# Altium PCB ESP32 V.1.0.PcbDoc (part 2 of 2)
Units mil, origin at the board's own origin, x right, y up, seen from the top; angles counter-clockwise.
Board outline 2700 x 1000 mil, 4 copper layers (L1, L2, L3, L4), stack 61.583 mil thick; 64 components, 73 nets, 299 pads, 144 vias.
Unrouted connection lines stored in the file: 52.
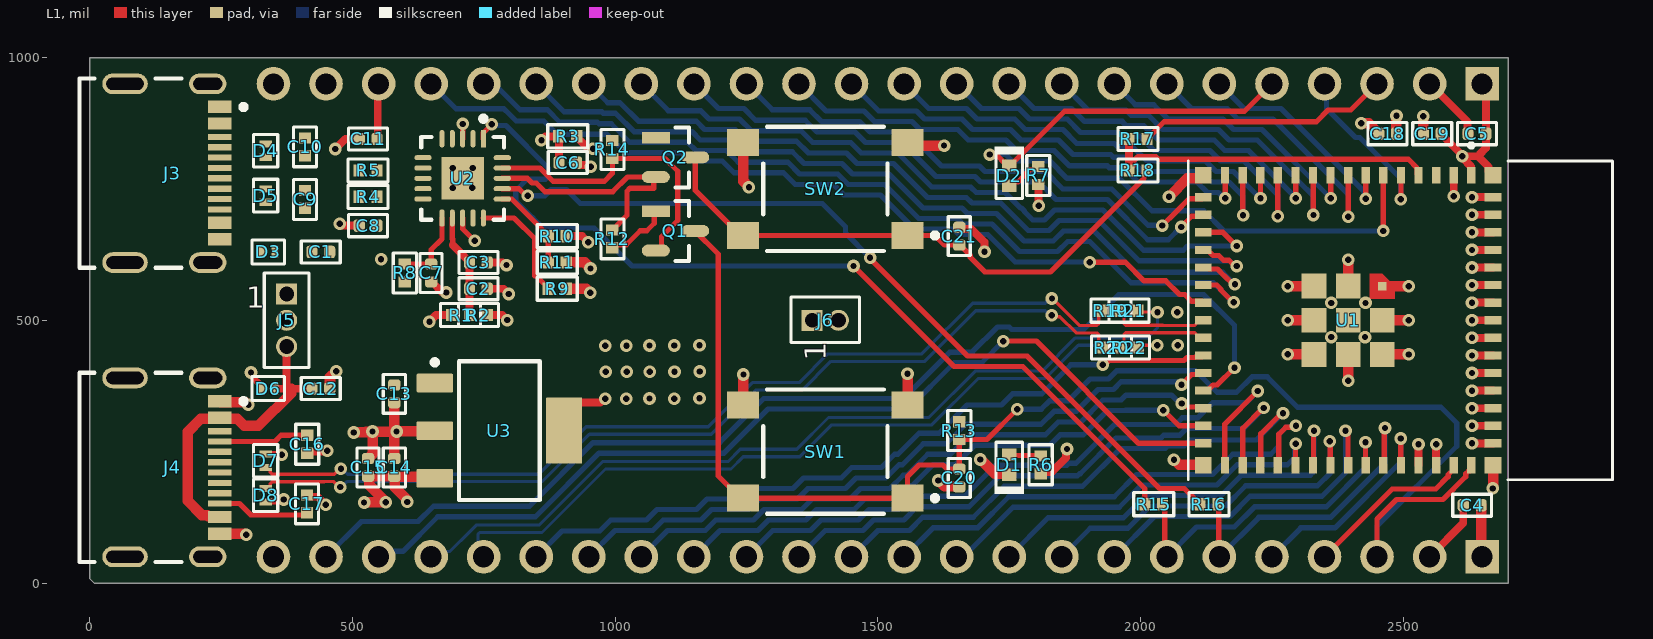
[diagram p0: L1 view]

## Part data (continued)
U1: "SMD module, ESP32-S3FN8, 8 MB SPI flash, PCB antenna", LCSC Part Number=C2913206, Manufacturer="Espressif Systems", Supplier Part Number=1965-ESP32-S3-MINI-1-N8CT-ND, Category=LDO, ComponentLink1Description=https://datasheet.octopart.com/ESP32-S3-MINI-1-N8-Espressif-Systems-datasheet-165560562.pdf?src-supplier=TME, ComponentLink1URL=https://datasheet.octopart.com/ESP32-S3-MINI-1-N8-Espressif-Systems-datasheet-165560562.pdf?src-supplier=TME, Manufacturer Part Number=ESP32-S3-MINI-1-N8, Pricing="1=3.1, 650=3.10002 (USD)", RoHS=No, Stock=7263, Supplier=Digikey
U2: "IC USB SERIAL FULL UART 20QFN", Case/Package=HVQCCN, LCSC Part Number=C132159, Manufacturer=FTDI, Max Operating Temperature=85°C, Max Supply Current=8.4mA, Max Supply Voltage=5.5V, Min Operating Temperature=-40°C, Min Supply Voltage=2.97V, Nominal Supply Voltage=5V, Package Shape=Square, Package Style="CHIP CARRIER, HEAT SINK/SLUG, VERY THIN PROFILEMeter", Power Supplies=3.3/5V, Supplier Part Number=768-1128-1-ND, Temperature Grade=INDUSTRIAL, Category="Interface ICs", ComponentLink1Description=https://datasheet.ciiva.com:443/pdfs/VipMasterIC/IC/FTDI/FTDIS00099/FTDIS00099-1.pdf?src-supplier=IHS+Markit, ComponentLink1URL=https://datasheet.ciiva.com:443/pdfs/VipMasterIC/IC/FTDI/FTDIS00099/FTDIS00099-1.pdf?src-supplier=IHS+Markit, ComponentLink2Description=https://datasheet.ciiva.com/1787/ds-ft231x-1787312.pdf?src-supplier=Digikey, ComponentLink2URL=https://datasheet.ciiva.com/1787/ds-ft231x-1787312.pdf?src-supplier=Digikey, ComponentLink3Description=https://datasheet.ciiva.com/30475/0900766b811020d3-30475405.pdf?src-supplier=Rs, ComponentLink3URL=https://datasheet.ciiva.com/30475/0900766b811020d3-30475405.pdf?src-supplier=Rs, ComponentLink4Description=https://datasheet.ciiva.com/4787/ds-ft231x-13571-4787570.pdf?src-supplier=Mouser, ComponentLink4URL=https://datasheet.ciiva.com/4787/ds-ft231x-13571-4787570.pdf?src-supplier=Mouser, ComponentLink5Description=https://datasheet.ciiva.com/1787/ft-x-series-1787313.pdf?src-supplier=Digikey, ComponentLink5URL=https://datasheet.ciiva.com/1787/ft-x-series-1787313.pdf?src-supplier=Digikey, ComponentLink6Description=https://datasheet.ciiva.com/1787/ft-x-series-1787314.pdf?src-supplier=Digikey, ComponentLink6URL=https://datasheet.ciiva.com/1787/ft-x-series-1787314.pdf?src-supplier=Digikey, Height - Seated (Max)=0.8mm, JESD-30 Code=S-XQCC-N20, Length=4mm, Manufacturer Part Number=FT231XQ-R, Pins=20, Pricing="1=2.34, 25=2.27, 100=2.2, 250=2, 500=1.82002, 1000=1.7625 (USD)", Qualification Status="Not Qualified", Reach SVHC Compliant=Yes, RoHS=Yes, RoHS Compliant=Yes, Stock=54348, Supplier=Digikey, Surface Mount=Yes, Technology=CMOS, Terminal Form="No Lead", Terminal Pitch=0.5mm, Terminal Position=QUAD, Width=4mm
U3: "IC REG LINEAR 3.3V 1.5A SOT223-4", Case/Package=SOP, Dropout Voltage1-Max=550mV, Dropout Voltage1-Nom=340mV, Input Voltage Absolute-Max=20V, LCSC Part Number=C181262, Manufacturer="Texas Instruments", Min Input Voltage=3.8V, Operating Temperature, TJ-Max=125°C, Operating Temperature, TJ-Min=-40°C, Output Current1-Max=1.5A, Output Voltage1-Max=3.4V, Output Voltage1-Min=3.2V, Output Voltage1-Nom=3.3V, Package Body Material=Plastic, Package Shape=Rectangular, Peak Reflow Temperature (Cel)=260°C, Supplier Part Number=296-24897-1-ND, Voltage Tolerance-Max=3%, Adjustability=FIXED, Category="Voltage Regulators - Linear", Channels=1, ComponentLink1Description=https://www.ti.com:443/lit/ds/symlink/tl1963a.pdf?src-supplier=IHS+Markit, ComponentLink1URL=https://www.ti.com:443/lit/ds/symlink/tl1963a.pdf?src-supplier=IHS+Markit, ComponentLink2Description=https://datasheet.ciiva.com/2046/-2046068.pdf?src-supplier=Digikey, ComponentLink2URL=https://datasheet.ciiva.com/2046/-2046068.pdf?src-supplier=Digikey, Height - Seated (Max)=1.8mm, JESD-30 Code=R-PDSO-G4, JESD-609 Code=e3, Length=6.5mm, Manufacturer Part Number=TL1963A-33DCYR, Max Supply Voltage=20V, Moisture Sensitivity Level=2, Number of Outputs=1, Packaging="Tape and Reel", Pins=4, Pricing="1=2.78, 10=2.075, 25=1.8984, 100=1.7043, 250=1.61188, 500=1.55614, 1000=1.51027 (USD)", Qualification Status="Not Qualified", Reach SVHC Compliant=Yes, Regulator Type="FIXED POSITIVE SINGLE OUTPUT LDO REGULATOR", RoHS=Yes, RoHS Compliant=Yes, Stock=4696, Supplier=Digikey, Surface Mount=Yes, Technology=BIPOLAR, Terminal Finish=Tin, Terminal Form="Gull Wing", Terminal Pitch=2.3mm, Terminal Position=DUAL, Width=3.5mm

## Via types
v1: diameter 24, hole 12, L1 to L4, 144 vias

## Nets (pads, with @x,y where several pads share a name; then routed paths per layer and width w, separated by ;. In a path a pad name is that pad's centre, name@x,y a point inside that pad or via, vN(x,y) a via of type N, cw(c..) or ccw(c..) an arc to the next point about the centre after c; other vN are vias at no path point)
+3V3: C4.2 C5.2 C18.2 C19.2 J1.2 J2.1 J6.2 R2.1 R3.1 R6.2 R7.2 R13.2 U1.3 | length 495.3
  L1 w15: R2.1 785.39,510 v1(795.06,500.34) ; R3.1 927.01,848.82 949.18,826.65 v1(957.96,826.65) ; R7.2 1805.67,758.16 1805.67,718.17 v1(1806.08,717.75) ; R6.2 1813.13,211.12 1831.12,211.12 1858.28,238.28 1858.28,253.28 v1(1860,255) ; J1.2 2622.44,877.56 C5.2@2622.44,855.63
  L1 w20: C18.2 v1(2486.93,888.93) v1@2487,889 ; C19.2 v1(2538.07,888.07) v1@2539,889 ; C5.2@2622.44,855.63 C5.2 ; C4.2 2647.93,52.07 J2.1
+3V3_FTDI: C6.2 C8.2 R3.2 R8.1 U2.10 U2.20 | length 80.3
  L1 w15: R8.1@596.87,576.12 R8.1 ; v1@867.12,850 R3.2 R3.2 893.03,800.04 C6.2
  other v1: 554.79,615.87 859.89,842.77
+3V3_REG: C14.2 C15.2 J6.1 U3.3 | length 292.9
  L1 w20: v1(522.41,153.26) 563.02,153.26 v1(563.55,153.8) 563.55,154.88 548.71,169.72 548.71,170.07 531.81,186.97 531.81,202.44 531.18,203.07 C15.2 C14.2 ; v1(604.7,154.34) 603.93,155.1 603.93,159.6 581.1,182.44 581.1,202.44 580.47,203.07 C14.2 ; U3.3 653.98,202.44 580.63,202.44 C14.2
+5V: C11.2 C13.2 J1.22 J5.2 R1.1 U3.1 | length 153.7
  L1 w10: C11.2 C11.2@548.46,846.54 ; J1.22@548.46,948.46 J1.22
  L1 w15: C11.2@548.46,846.54 J1.22@548.46,948.46 ; v1(646.73,497.45) 659.28,510 R1.1
+5V_VBUS1: C1.2 D3.2 J3.A4B9 J3.B4A9 J5.1 R10.2 | length 46.7
  L1 w15: R10.2 937.66,660 v1(949.01,648.65)
+5V_VBUS2: C12.2 D6.2 J4.A4B9 J4.B4A9 J5.3 | length 603.2
  L1 w14: D6.2 375,370 ; 383.58,370 C12.2
  L1 w15: 375,370 383.58,361.42 ; 375,374.35 J5.3
  L1 w20: J4.B4A9 245.83,127.4 225.52,127.4 223.65,129.28 213.95,129.28 186.49,156.73 186.49,287.42 211.83,312.76 245.83,312.76 J4.A4B9 249.45,312.76 281.21,312.76 294.72,299.24 295.73,299.24 321.4,299.24 383.58,361.42 383.58,370
+VCC_FTDI: C2.2 C3.2 R1.2 R2.2 U2.12 | length 198.2
  L1 w10: U2.12 690.32,655.17 691.03,654.45
  L1 w10.01: 691.03,643.22 691.03,654.45
  L1 w15: 691.03,643.22 723.07,611.18 C3.2 C2.2 723.03,559.96 R2.2 R2.2
BTN_GPIO0: C21.2 Q2.3 R18.1 SW2.1 SW2.2 | length 1074.6
  L1 w10.01: Q2.3 1152.42,747.58 1238.58,661.42 SW2.2 SW2.1 1608.57,661.42 1626.91,643.07 C21.2 1656.18,643.07 1676.02,623.23 1676.02,619.33 1703.7,591.65 1828.3,591.65 2006.38,769.73 2006.38,779.38 R18.1
CHIP_PU: C20.2 J2.3 Q1.3 R13.1 SW1.1 SW1.2 U1.45 | length 2755.2
  L1 w10: Q1.3 1196.41,626.01 1196.41,203.59 1238.58,161.42 SW1.2 SW1.1 1556.5,202.37 1578.55,224.42 1623.76,224.42 1631.25,216.93 C20.2 R13.1 1707.58,272.99 v1(1765.28,330.7) ; J2.3 2450,121.72 2487.28,159 2575.25,159 2618.7,202.45 2618.7,207.8 2624.56,213.66 2626.42,213.66 2629.29,216.54 U1.45
  L4 w10: v1(1765.28,330.7) 1810.83,330.7 1826.78,346.64 1862.18,346.64 1903.96,388.43 1939.14,388.43 1954.89,404.17 2103.99,404.17 2145.27,362.89 2182.43,362.89 2211.87,392.33 2241.06,392.33 2298.87,334.52 2571.59,334.52 2601.63,304.48 2601.63,260.36 2450,108.73 J2.3
CON1_USB_N: D4.2 J3.A7 J3.B7 R4.1
CON1_USB_P: D5.2 J3.A6 J3.B6 R5.1
CON2_USB_N: D7.2 J4.A7 J4.B7 R19.1 | length 1790.8
  L1 w6.23: D7.2 339.92,220 343.7,216.23 343.7,210.76 347.35,207.11 440.85,207.11 440.97,207.23 465.78,207.23 476.2,217.65 v1(478.31,217.65) ; v1(1831.31,541.52) 1831.66,541.52 1883.09,490.09 1916.51,490.09 1920.16,493.74 1920.16,511.64 R19.1
  L4 w6.23: v1(478.31,217.65) 480.43,217.65 490.85,207.23 855.05,207.23 945.26,297.44 1177.52,297.44 1261.48,381.41 1350.41,381.41 1404.85,435.85 1583.64,435.85 1680.33,532.53 1818.78,532.53 1827.77,541.52 v1(1831.31,541.52)
CON2_USB_P: D8.2 J4.A6 J4.B6 R20.1 | length 1783.4
  L1 w6.23: D8.2 339.92,180 343.7,183.77 343.7,189.24 347.35,192.89 446.75,192.89 446.86,193 464.79,193 475.21,182.58 v1(477.32,182.58) ; v1(1831.17,509.31) 1833.76,506.73 1846.32,506.73 1877.2,475.86 1916.51,475.86 1920.16,472.21 1920.16,455.69 R20.1
  L4 w6.23: v1(477.32,182.58) 479.43,182.58 489.86,193 860.95,193 951.15,283.21 1183.41,283.21 1267.38,367.17 1356.3,367.17 1410.75,421.62 1589.54,421.62 1686.22,518.3 1818.64,518.3 1827.63,509.31 v1(1831.17,509.31)
CON_ESP_USB_N: J2.21 R21.1 | length 1631.1
  L1 w6.03: R21.1 1997.46,515.44 v1(2032.19,515.44)
  L4 w6.03: J2.21 660.17,60.17 685.82,60.17 724.09,98.44 735.84,110.19 855.17,110.19 976.06,231.08 1214.81,231.08 1238.18,254.45 1345.61,254.45 1406.21,315.05 1596.96,315.05 1685.17,403.26 1812.62,403.26 1875.91,466.55 2013.25,466.55 2032.19,485.48 v1(2032.19,515.44)
CON_ESP_USB_P: J2.20 R22.1 | length 1540
  L1 w6.03: R22.1 2000.05,452.52 v1(2031.77,452.52)
  L4 w6.03: J2.20 734.31,50 738.91,54.59 738.91,92.63 742.44,96.16 860.98,96.16 981.87,217.05 1220.62,217.05 1243.99,240.42 1351.43,240.42 1412.02,301.01 1602.77,301.01 1690.98,389.23 1818.43,389.23 1881.72,452.52 v1(2031.77,452.52)
CON_GPIO0: J1.3 R17.1 | length 482.2
  L1 w10.01: R17.1 2012.01,846.18 2017.63,851.81 2018.81,851.81 2044.86,877.85 2334.67,877.85 2356.82,900 2400,900 J1.3
DTR_FTDI: Q2.2 R12.2 U2.18 | length 471.7
  L1 w10: U2.18 833.43,770 842.1,761.33 843.38,761.33 849.97,761.33 866.65,744.65 995.43,744.65 1023.59,772.81 Q2.2@1073.75,772.81 ; R12.2 1022.85,699.86 1022.85,745.55 1028.71,751.41 1073.75,751.41 1073.75,768.77 Q2.2
ESP_USB_N: R19.2 R21.2 U1.23 | length 184.8
  L1 w6.03: R19.2 1968.32,510.56 1968.32,493.93 1971.86,490.39 2042.63,490.39 2042.74,490.28 2103.18,490.28 2106.72,493.82 2106.72,495.14 2111.57,500 U1.23
ESP_USB_P: R20.2 R22.2 U1.24 | length 184.8
  L1 w6.03: R20.2 1968.32,454.81 1968.32,472.83 1971.86,476.36 2036.82,476.36 2036.93,476.25 2103.18,476.25 2106.72,472.72 2106.72,471.39 2111.57,466.54 U1.24
FTDI_RESET: C7.2 R8.2 U2.11 | length 146.2
  L1 w10: R8.2 R8.2 649.96,606.97 C7.2 650,634.26 670.63,654.89 U2.11
FTDI_USB_N: R4.2 U2.9
FTDI_USB_P: R5.2 U2.8
GND: C1.1 C2.1 C3.1 C4.1 C5.1 C6.1 C7.1 C8.1 C9.1 C10.1 C11.1 C12.1 C13.1 C14.1 C15.1 C16.1 C17.1 C18.1 C19.1 C20.1 C21.1 D1.1 D3.1 D4.1 D5.1 D6.1 D7.1 D8.1 J1.1 J1.23 J2.2 J2.24 J3.A1B12 J3.B1A12 J3.S1 J3.S2 J3.S3 J3.S4 J4.A1B12 J4.B1A12 J4.S1 J4.S2 J4.S3 J4.S4 R9.2 R11.1 SW1.3 SW1.4 SW2.3 SW2.4 U1.1 U1.2 U1.42 U1.43 U1.46 U1.47 U1.48 U1.49 U1.50 U1.51 U1.52 U1.53 U1.54 U1.55 U1.56 U1.57 U1.58 U1.59 U1.60 U1.61 U1.62 U1.63 U1.64 U1.65 U1.66 U1.67 U1.68 U1.69 U1.70 U1.71 U1.72 U1.73 U2.3 U2.13 U2.21 U3.2 U3.4 | length 3475.4
  L1 w10: U2.13 710.23,694.36 710.23,673.78 v1(732.93,651.08)
  L1 w10.01: U2.3 v1(710,873.58)
  L1 w12: v1(307.34,400.53) 307.34,394.79 327.2,374.92 D6.1 ; D8.1 335.89,155.3 362.63,155.3 366.19,158.85 v1(369.43,158.85) ; D7.1 364.15,245.59 v1@367.17,242.57
  L1 w14: C17.1 417.36,164.14 434.09,164.14 v1(449.38,148.85) ; C16.1 416.85,249.66 450.47,249.66 v1(452.38,251.57)
  L1 w15: v1(467.66,825.96) 486.71,845 C11.1 ; v1(476.05,683.46) 479.5,680 C8.1 ; C7.1 651.18,573.07 671.42,552.83 v1(678.99,552.83) ; C2.1 787.89,560 v1(797.95,549.94) ; C3.1 786.02,610 791.01,605.01 v1(793.44,605.01) ; U3.4 903.03,316.48 929.98,343.43 971.8,343.43 979.13,350.75 v1(981.56,350.75) ; C6.1 926.93,798.82 930.06,795.69 947.65,795.69 951.09,792.25 v1(953.53,792.25) ; C21.1 1658.13,673.8 1677.86,673.8 1703.02,648.64 v1(1703.02,630.52) ; U1.42 v1(2528.9,264.29) ; J2.2 2614.07,114.07 C4.1 ; U1.43 v1(2562.36,264.29) ; C19.1 2571.93,853.82 2612,813.75 v1(2612,812) ; v1(2595.83,735.71) U1.2 ; U1.1 2628.92,775.96 2628.92,792.65 2612,809.56 v1(2612,812) ; v1@2630,735 v1(2630.75,734.25) U1.60 ; v1(2630.75,265.75) U1.46 ; v1(2630.75,299.21) U1.47 ; v1(2630.75,332.68) U1.48 ; v1(2630.75,366.14) U1.49 ; v1(2630.75,399.61) U1.50 ; v1(2630.75,433.07) U1.51 ; v1(2630.75,466.54) U1.52 ; v1(2630.75,500) U1.53 ; v1(2630.75,533.46) U1.54 ; v1(2630.75,566.93) U1.55 ; v1(2630.75,600.39) U1.56 ; v1(2630.75,633.86) U1.57 ; v1(2630.75,667.32) U1.58 ; v1(2630.75,700.79) U1.59 ; J1.1 2656.93,943.07 C5.1 2656.93,827.77 2644.72,815.56 2644.72,814.72 2642,812 ; U1.62 2662.38,783.84 2662.38,791.62 2642,812 ; v1(2612,812) 2642,812
  L1 w20: J4.B1A12 295.1,94.09 297.08,92.11 v1(298.16,92.11) ; J4.A1B12 249.45,344.25 296.13,344.25 301.29,339.1 v1(302.37,339.1) ; C12.1 457.56,370.63 457.56,391.31 v1(469.26,403.02) ; v1(502.92,286.54) 503.68,287.3 525.79,287.3 526.1,287.6 537.89,287.6 v1(538.52,288.23) ; C15.1 531.18,236.93 531.81,237.56 531.81,238.74 538.52,245.45 v1(538.52,288.23) ; C14.1 580,282.89 584.26,287.15 v1(584.26,288.23) ; C13.1 580,293.57 584.26,289.31 v1(584.26,288.23) ; U3.2 655.97,289 585.03,289 v1(584.26,288.23) ; R9.2 945.04,560 v1(952.97,552.07) ; R11.1 941.89,610 v1(953.33,598.56) ; SW1.4 1243.5,396.11 v1(1244.22,396.83) ; SW2.4 1243.88,838.2 1243.88,764.97 1254.75,754.11 v1(1254.75,753.02) ; SW1.3 v1(1556.5,398.5) ; SW2.3 1562.66,832.42 v1(1626.09,832.42) ; v1(1615,195) 1616.08,195 1627.38,183.7 1654.37,183.7 C20.1 ; v1(1695,235) 1696.08,235 1722.97,208.11 1748.19,208.11 D1.1 ; v1(2054.17,735.31) 2088.7,769.84 2113.7,769.84 U1.63 ; v1(2063.46,234.43) 2064.54,234.43 2073.7,225.27 2118.59,225.27 U1.64 ; v1(2280,435.08) U1.73@2330.04,435.08 ; v1(2280,500.04) U1.72@2330.04,500.04 ; v1(2280,565) 2330.04,565 U1.71 ; v1(2395,384.96) U1.70 ; U1.69@2395.08,565 v1(2395.08,615.04) ; v1(2420,875) 2434.25,875 2453.07,856.18 C18.1 ; U1.68 v1(2510.08,435) ; U1.67 v1(2510.08,499.96) ; U1.66@2460.04,564.92 v1(2510.08,564.92) ; v1(2670,180) 2670.63,180.63 U1.65 ; v1(538.52,288.23) v1(584.26,288.23)
  other v1: 365.66,244.08 1021.58,350.61 1065.43,351.12 1112.58,350.93 1160.73,351.35 982.1,401.91 1022.11,401.77 1065.96,402.28 1113.11,402.08 1161.27,402.51 981.61,451.71 1021.62,451.57 1065.47,452.08 1112.62,451.88 1160.77,452.31 2070.48,452.51 2363,468 2427,468 2069.89,515.04 2363,533 2428,533 691.19,751.8 728.29,752.15 691.37,789.67 729.48,789.67
GPIO0: R17.2 R18.2 U1.4 | length 649.3
  L1 w10: R18.2 1977.99,786.18 1986.38,794.57 1986.38,803.02 1995.16,811.81 2028.85,811.81 2034.32,806.34 2509.52,806.34 2526.02,789.84 2526.02,778.46 U1.4
  L1 w15: R18.2 R17.2
GPIO1: J1.4 U1.5 | length 320.6
  L1 w10: v1@2495,740 2495.43,740.43 U1.5
  L4 w10: J1.4 2353.82,946.18 2353.82,903 2408.82,848 2417,848 2495,770 v1(2495,730)
GPIO2: D2.1 J1.5 U1.6 | length 1525.4
  L1 w10: v1(1713.25,815.26) 1715.93,812.59 1728.16,812.59 1740.24,800.51 1743.19,800.51 D2.1 1751.97,793.7 1758.78,800.51 1758.78,801.5 1855.14,897.86 2197.86,897.86 J1.5 ; v1@2461.97,670.04 U1.6
  L4 w10: v1(1713.25,815.26) 1743.31,815.26 1755.58,803 1827.29,803 1860.29,770 1960.15,770 2021.84,708.31 2120.23,708.31 2158.54,670 v1(2461.93,670)
GPIO3: J1.6 U1.7 | length 419.6
  L1 w10: U1.7@2428.07,775.16 U1.7 v1(2428.5,731.5)
  L4 w10: J1.6 2197,903 2267,903 2425.83,744.17 2425.83,734.17 v1(2428.5,731.5)
GPIO4: J1.7 U1.8 | length 553.7
  L1 w10: U1.8 2395.39,775.24 v1(2395.39,697.22)
  L4 w10: J1.7 2097,903 2165,903 2185,883 2252,883 2395.73,739.27 2395.73,697.57 v1(2395.39,697.22)
GPIO5: J1.8 U1.9 | length 546.1
  L1 w10: v1(2362.01,731.93) U1.9@2362.01,776.02
  L4 w10: J1.8 1990,910 2025,910 2052,883 2156.72,883 2176.72,863 2230.94,863 v1@2361.78,732.15
GPIO6: J1.9 U1.10 | length 679.1
  L1 w10: U1.10 2328.49,775.22 2328.49,700.61 v1(2328.86,700.24)
  L4 w10: J1.9 1899.86,900.14 1971.58,900.14 1981.72,890 2015,890 2042,863 2148.43,863 2168.43,843 2222,843 2306.07,758.93 2306.26,758.93 2322.08,743.11 2322.08,742.92 2328.5,736.5 2328.5,700.6 v1(2328.86,700.24)
GPIO7: J1.10 U1.11 | length 680.4
  L1 w10: v1(2295.08,731.93) U1.11@2295.08,776.02
  L4 w10: J1.10 1797,903 1868.72,903 1893.19,878.52 1964.91,878.52 1973.43,870 2006.72,870 2033.72,843 2140.15,843 2160.15,823 2205.59,823 2295.08,733.51 v1(2295.08,731.93)
GPIO8: J1.11 U1.12 | length 818
  L1 w10: v1(2260.87,698) 2261.03,698.15 2261.03,775.44 U1.12@2261.4,775.81
  L4 w10: J1.11 1697,903 1768.72,903 1788.72,883 1860.43,883 1885.93,857.5 1957.64,857.5 1965.15,850 1998.43,850 2025.43,823 2131.86,823 2151.86,803 2197,803 2261.62,738.38 2261.62,698.74 v1(2260.87,698)
GPIO9: J1.12 U1.13 | length 812.6
  L1 w10: v1(2228.15,731.93) U1.13@2228.15,776.02
  L4 w10: J1.12 1597,903 1668.72,903 1688.72,883 1760.43,883 1780.43,863 1852.15,863 1878.66,836.49 1950.38,836.49 1956.86,830 1985,830 2012,803 2123.58,803 2143.58,783 2176.62,783 2227.69,731.93 v1(2228.15,731.93)
GPIO10: J1.13 U1.14 | length 945.6
  L1 w10: U1.14@2194.32,775.65 2194.63,775.34 2194.63,700.49 v1(2195,700.11)
  L4 w10: J1.13 1501.64,898.36 1573.36,898.36 1588.72,883 1660.43,883 1680.43,863 1752.15,863 1772.15,843 1843.86,843 1871.39,815.47 1943.11,815.47 1948.58,810 1976.72,810 2003.72,783 2115.29,783 2135.29,763 2168.33,763 2195,736.33 v1(2195,700.11)
GPIO11: J1.14 U1.15 | length 945.6
  L1 w10: v1(2161.22,731.93) U1.15@2161.22,776.02
  L4 w10: J1.14 1401.64,898.36 1473.36,898.36 1493.36,878.36 1565.07,878.36 1580.43,863 1652.15,863 1672.15,843 1743.86,843 1763.86,823 1835.58,823 1864.73,793.85 1936.44,793.85 1940.29,790 1968.43,790 1995.43,763 2107.01,763 2127.01,743 2148.36,743 2159.43,731.93 v1(2161.22,731.93)
GPIO12: J1.15 U1.16 | length 1003.6
  L1 w10: v1(2041.35,680.17) 2066.23,705.05 2092.56,731.38 2116.57,731.38 U1.16
  L4 w10: J1.15 1299.3,900.7 1370.3,900.7 1392.64,878.36 1465.07,878.36 1485.07,858.36 1556.79,858.36 1621.48,793.67 1693.2,793.67 1703.86,783 1819.01,783 1852.01,750 1945.16,750 2014.35,680.81 2040.72,680.81 v1(2041.35,680.17)
GPIO13: J1.16 U1.17 | length 1112.1
  L1 w10: v1(2077.14,677.56) 2097.49,697.91 2108.7,697.91 2111.57,700.79 U1.17
  L4 w10: J1.16 1197,903 1245.26,903 1267.57,880.7 1362.02,880.7 1384.36,858.36 1456.79,858.36 1476.79,838.36 1546.22,838.36 1610.91,773.67 1684.91,773.67 1695.58,763 1806.3,763 1839.3,730 1936.88,730 2013.71,653.17 2052.75,653.17 v1(2077.14,677.56)
GPIO14: J1.17 U1.18 | length 1358.3
  L1 w10: U1.18 2156.86,667.32 v1(2182.83,641.34)
  L4 w10: J1.17 1101.13,898.87 1162.82,898.87 1178.68,883 1236.98,883 1259.28,860.7 1353.73,860.7 1376.07,838.36 1448.51,838.36 1468.51,818.36 1537.93,818.36 1602.62,753.67 1676.63,753.67 1687.29,743 1742.29,743 1771.62,713.67 1773.22,713.67 1779.08,707.81 1779.08,706.57 1794.9,690.75 1817.27,690.75 1836.51,710 1928.6,710 2005.42,633.17 2081.3,633.17 2089.47,641.34 v1(2182.83,641.34)
GPIO15: J1.18 U1.19 | length 1468.6
  L1 w10: U1.19 2127.32,633.86 2137.91,623.27 2148.75,623.27 2157.81,614.21 2167.98,614.21 2179.05,603.14 v1(2182.83,603.14)
  L4 w10: J1.18 986.03,913.97 1009.28,913.97 1044.38,878.87 1154.53,878.87 1170.4,863 1228.7,863 1251,840.7 1345.45,840.7 1367.79,818.36 1440.22,818.36 1460.22,798.36 1529.65,798.36 1594.34,733.67 1668.34,733.67 1679.01,723 1734,723 1786.25,670.75 1825.55,670.75 1844.8,690 1920.31,690 1997.14,613.17 2169.01,613.17 2179.05,603.14 v1(2182.83,603.14)
GPIO16: J1.19 U1.20 | length 1576.8
  L1 w10: U1.20 2127.32,600.39 2130.2,597.52 2146.21,597.52 2158.34,585.39 2158.95,585.39 2175.77,568.57 v1(2179.56,568.57)
  L4 w10: J1.19 903.15,896.85 974.86,896.85 977.74,893.97 1000.99,893.97 1036.1,858.87 1146.25,858.87 1162.12,843 1220.41,843 1242.72,820.7 1337.17,820.7 1359.51,798.36 1431.94,798.36 1451.94,778.36 1521.36,778.36 1586.05,713.67 1660.06,713.67 1670.73,703 1725.72,703 1777.97,650.75 1833.83,650.75 1853.08,670 1911.53,670 1990.15,591.38 2156.41,591.38 2179.22,568.57 v1(2179.56,568.57)
GPIO17: J1.20 U1.21 | length 1688
  L1 w10: U1.21 2144.81,566.93 2152.56,559.18 2152.56,557.39 2175.58,534.36 v1(2177.38,534.36)
  L4 w10: J1.20 760.33,939.67 779.77,939.67 818.96,900.48 871.23,900.48 894.86,876.85 966.58,876.85 969.46,873.97 992.71,873.97 1027.81,838.87 1137.96,838.87 1153.83,823 1212.13,823 1234.43,800.7 1328.88,800.7 1351.22,778.36 1423.65,778.36 1443.65,758.36 1513.08,758.36 1577.77,693.67 1651.77,693.67 1662.44,683 1717.44,683 1769.68,630.75 1842.12,630.75 1861.36,650 1903.24,650 1981.86,571.38 2138.56,571.38 2175.58,534.36 v1(2177.38,534.36)
GPIO18: J1.21 U1.22 | length 1642
  L1 w10: v1(1903.06,610.62) 1970.91,610.62 2006.5,575.03 2047.94,575.03 2073.89,549.08 2084.09,549.08 2097.16,536.01 2116.9,536.01 U1.22
  L4 w10: J1.21 697.71,902.29 788.86,902.29 798.63,892.52 812.06,879.09 843.38,879.09 864.35,879.09 889.46,853.97 984.42,853.97 1019.53,818.87 1129.68,818.87 1145.55,803 1203.84,803 1226.15,780.7 1320.6,780.7 1342.94,758.36 1415.37,758.36 1435.37,738.36 1504.8,738.36 1569.49,673.67 1643.49,673.67 1654.16,663 1709.15,663 1761.4,610.75 1902.93,610.75 v1(1903.06,610.62)
GPIO21: J2.19 U1.25 | length 1428.1
  L1 w10: v1(1927.95,415.43) 1931.74,415.43 1939.68,423.36 2082.56,423.36 2088.42,429.22 2102.84,429.22 2103.82,430.2 2116.57,430.2 U1.25
  L4 w10: J2.19 899.14,99.14 970.86,99.14 991.72,120 1060,120 1080,140 1155.15,140 1175.15,160 1246.86,160 1266.86,180 1338.58,180 1358.58,200 1430.29,200 1450.29,220 1506.86,220 1531.91,245.05 1538.43,245.05 1578.38,285 1616,285 1669.67,338.67 1735.07,338.67 1756.41,360.01 1811.86,360.01 1867.28,415.43 v1(1927.95,415.43)
GPIO26: J2.18 U1.26 | length 1319
  L1 w10: v1(2077.76,377.17) 2097.32,396.73 2116.57,396.73 U1.26
  L4 w10: J2.18 1000,100 1071.72,100 1091.72,120 1163.43,120 1183.43,140 1255.15,140 1275.15,160 1346.86,160 1366.86,180 1438.58,180 1458.58,200 1515.15,200 1540.2,225.05 1546.72,225.05 1586.67,265 1630.25,265 1667.25,302 1810.43,302 1835.07,326.64 1877.35,326.64 1919.14,368.43 1948.14,368.43 1962.6,382.89 2068.26,382.89 2073.98,377.17 v1(2077.76,377.17)
GPIO33: J2.17 U1.28 | length 1207.1
  L1 w10: v1(2078.35,341.65) 2082.14,341.65 2088.7,335.09 2117.04,335.09 U1.28
  L4 w10: J2.17 1100,100 1171.72,100 1191.72,120 1263.43,120 1283.43,140 1355.15,140 1375.15,160 1446.86,160 1466.86,180 1523.43,180 1548.48,205.05 1555,205.05 1594.95,245 1638.53,245 1675.53,282 1818.72,282 1843.36,306.64 1886.35,306.64 1928.14,348.43 1963.01,348.43 1972.12,357.54 2058.67,357.54 2074.56,341.65 v1(2078.35,341.65)
GPIO34: J2.16 U1.29 | length 1097.3
  L1 w10: v1(2043.23,328.99) 2073.01,299.21 U1.29
  L4 w10: J2.16 1200,100 1271.72,100 1291.72,120 1363.43,120 1383.43,140 1455.15,140 1475.15,160 1531.72,160 1556.77,185.05 1565,185.05 1604.95,225 1646.82,225 1683.82,262 1827,262 1847,282 1890.91,282 1937.34,328.43 1971.29,328.43 1971.86,328.99 v1(2043.23,328.99)
GPIO35: J2.15 U1.31 | length 1270.9
  L1 w10: U1.31@2160.39,224.02 2160.39,302.67 v1(2223.05,365.33)
  L4 w10: J2.15 1300,100 1371.72,100 1391.72,120 1463.43,120 1483.43,140 1540,140 1565.05,165.05 1665.1,165.05 1724.19,224.14 1860.01,224.14 1863.87,228 1876.91,228 1950.34,301.43 2066.43,301.43 2079.27,314.27 2108.22,314.27 2136.84,342.89 2200.61,342.89 v1(2223.05,365.33)
GPIO36: J2.14 U1.32 | length 1128.9
  L1 w10: U1.32@2193.82,223.98 2194.63,224.78 2194.63,294.63 2233.16,333.16 v1(2234.65,333.16)
  L4 w10: J2.14 1400,100 1471.72,100 1491.72,120 1550,120 1575.05,145.05 1673.38,145.05 1732.47,204.14 1880.12,204.14 1883.98,208 1885.19,208 1953.26,276.07 2038.63,276.07 2043.99,281.43 2074.72,281.43 2087.56,294.27 2195.76,294.27 v1(2234.65,333.16)
GPIO37: J2.13 U1.33 | length 1052.9
  L1 w10: U1.33@2227.28,223.98 2228.86,225.55 2228.86,283.86 2268.06,323.06 v1(2270.94,323.06)
  L4 w10: J2.13 1500,100 1560,100 1585.05,125.05 1681.67,125.05 1740.76,184.14 1889.62,184.14 1961.55,256.07 2046.91,256.07 2052.27,261.43 2074.64,261.43 2074.68,261.39 2082.96,261.39 2093.76,272.19 2220.06,272.19 v1(2270.94,323.06)
GPIO38: J2.12 U1.34 | length 961.4
  L1 w10: U1.34@2260.75,223.98 2263.09,226.32 2263.09,283.09 2276.44,296.44 2292.95,296.44 v1(2295.62,299.12)
  L4 w10: J2.12 1605.05,105.05 1689.95,105.05 1749.04,164.14 1950,164.14 1992.5,206.64 2136.94,206.64 2175.29,245 2247.67,245 2262.32,259.65 2262.32,282.32 2276.44,296.44 2292.95,296.44 v1(2295.62,299.12)
GPIO39: J2.11 U1.35 | length 788.7
  L1 w10: U1.35@2294.82,224.94 2294.82,264.82 v1(2295,265)
  L4 w10: J2.11 1663.18,50 1757.33,144.14 1959.29,144.14 2001.79,186.64 2145.22,186.64 2183.58,225 2279.75,225 2292.75,238 2292.75,262.75 v1(2295,265)
GPIO40: J2.10 U1.36 | length 791.9
  L1 w10: U1.36@2327.68,223.98 2329.06,225.35 2329.06,289.06 v1(2330,290)
  L4 w10: J2.10 1824.14,124.14 1967.57,124.14 2010.07,166.64 2153.51,166.64 2191.86,205 2322.72,205 2330,212.28 v1(2330,290)
GPIO41: J2.9 U1.37 | length 684.8
  L1 w10: v1(2360,270) 2360.79,269.21 2360.79,224.33 U1.37@2361.14,223.98
  L4 w10: J2.9 1904.14,104.14 1975.86,104.14 2018.36,146.64 2161.79,146.64 2200.15,185 2336.86,185 2361.14,209.28 2361.14,268.86 v1(2360,270)
GPIO42: J2.8 U1.38 | length 654.3
  L1 w10: v1(2390,290) 2390,286.21 2394.61,281.61 U1.38@2394.61,223.98
  L4 w10: J2.8 2026.64,126.64 2170.07,126.64 2208.43,165 2345.15,165 2390,209.85 v1(2390,290)
GPIO45: J2.5 U1.41 | length 414.6
  L1 w10: v1(2495,275) 2495.22,274.78 U1.41@2495.22,225.06
  L4 w10: J2.5 2305,105 2370,105 2495,230 v1(2495,275)
GPIO46: J2.4 U1.44 | length 324.7
  L1 w10: J2.4 2479,179 2561.79,179 2585.24,202.45 2585.24,205.94 2595.83,216.54 U1.44
GPIO47: J2.23 U1.27 | length 2121.9
  L1 w10: U1.27 2127.32,366.14 2137.91,376.73 2145.69,376.73 v1(2178.64,409.68)
  L4 w10: J2.23 517.22,117.22 625.3,117.22 654.28,146.21 836.94,146.21 957.83,267.09 1198.99,267.09 1282.96,351.06 1548.84,351.06 1637.05,439.27 1679.54,439.27 1727.61,487.34 1749.98,487.34 1754.92,482.4 1782.3,482.4 1782.46,482.56 1891.92,482.56 1958.6,549.24 2119.98,549.24 2178.64,490.58 v1(2178.64,409.68)
GPIO48: J2.22 U1.30 | length 1820
  L1 w10: v1(1738.79,460.34) 1801.65,460.34 1996.24,265.75 U1.30
  L4 w10: J2.22 560.33,60.33 596.69,60.33 662.57,126.21 848.54,126.21 969.42,247.09 1207.28,247.09 1291.24,331.06 1557.12,331.06 1645.34,419.27 1697.73,419.27 v1(1738.79,460.34)
NetC9_2: C9.2 J3.A5
NetC10_2: C10.2 J3.B5
NetC16_2: C16.2 J4.A5 | length 171.6
  L1 w10: J4.A5 352.69,269.29 364.52,281.12 C16.2
NetC17_2: C17.2 J4.B5 | length 176.8
  L1 w10: J4.B5 285.28,151.18 306.9,129.56 409.53,129.56 C17.2
NetD1_2: D1.2 R6.1 | length 60.7
  L1 w10: D1.2 1750.85,242.85 1809.15,242.85 R6.1
NetD2_2: D2.2 R7.1 | length 70.6
  L1 w10: D2.2 1756.81,763.11 1766.69,763.11 1778.44,774.87 1778.44,775.41 1789.99,786.96 1799.62,786.96 R7.1
NetQ1_1: Q1.1 R12.1 | length 122.9
  L1 w10.01: R12.1 1000.62,643.62 1021.24,643.62 1047.92,670.3 1060.3,670.3 1074.64,684.63 1074.64,704.46 Q1.1
NetQ2_1: Q2.1 R14.1
NetR9_1: R9.1 U2.15 | length 221.5
  L1 w10: U2.15 807.89,694.59 847.07,655.41 847.07,584.62 849.56,584.62 872.99,561.18 R9.1
RTS_FTDI: Q1.2 R14.2 U2.19 | length 559.8
  L1 w10: U2.19 843.38,789.68 857.18,789.68 882.22,764.65 979.67,764.65 995,779.98 R14.2 1094.78,807.99 1119.29,783.48 1119.29,689.93 1088.23,658.86 1088.23,638.38 1082.44,632.6 Q1.2
RXD_FTDI: R15.2 U2.1 | length 1737.5
  L1 w10: U2.1 749.37,856.72 v1(765.43,872.78) ; v1(1453.83,603.29) 1645.19,411.92 1775.87,411.92 2007.99,179.8 R15.2
  L4 w10: v1(765.43,872.78) 767.78,870.43 792.43,870.43 872.96,789.9 872.96,774.37 867.1,768.51 843.38,768.51 833.01,768.51 811.06,746.57 811.06,727.51 843.38,695.2 862.93,675.65 960.19,675.65 1032.55,603.29 v1(1453.83,603.29)
TXD_FTDI: R16.2 U2.17 | length 1594.5
  L1 w10: U2.17 817,750.32 830.28,737.04 v1(834.06,737.04) ; v1(1485.29,619.02) 1485.29,617.23 1670.6,431.92 1784.15,431.92 2036.08,180 2082.99,180 2106.18,156.81 2107.36,156.81 2112.99,151.18 R16.2
  L4 w10: v1(834.06,737.04) 843.38,737.04 866.88,737.04 878.35,748.51 907.38,748.51 933.73,722.16 1394.18,722.16 1438.4,677.94 1438.4,665.91 v1(1485.29,619.02)
U0RXD: J2.6 R16.1 U1.40 | length 629.3
  L1 w10: R16.1 2148.5,148.5 2148.5,51.5 J2.6 ; U1.40@2461.54,223.98 2463.48,225.92 2463.48,293.48 v1(2465,295)
  L4 w10: J2.6 2225,125 2361.72,125 2465,228.28 v1(2465,295)
U0TXD: J2.7 R15.1 U1.39 | length 644.2
  L1 w10: R15.1 2046,146 2046,54 J2.7 ; U1.39@2428.07,223.98 v1(2428.07,268.07)
  L4 w10: J2.7 2106.64,106.64 2178.36,106.64 2216.72,145 2353.43,145 2428.07,219.64 v1(2428.07,268.07)
VBUS_SENSE: R10.1 R11.2 U2.16 | length 167.5
  L1 w10: U2.16 803.54,730.63 843.38,690.8 872.99,661.18 R11.2
pads on no net: J1.24 J3.A8 J3.B8 J4.A8 J4.B8 U2.2 U2.4 U2.5 U2.6 U2.7 U2.14

## Polygon pours and split planes (outlines as drawn)
GND on L3 (split plane): 2679.9,20.1 20.1,20.1 20.1,979.9 2679.9,979.9

## Text inside footprints (layer, text, board x,y; h text height)
J1: Bottom Overlay "1" at 2633,868 h40 r270
J2: Bottom Overlay "1" at 2633,-32 h40 r270
J5: Top Overlay "1" at 298,524 h40
J6: Top Overlay "1" at 1401,423 h40 r90